# EAGLE board Placa de Cima (EAGLE 9.3.0)
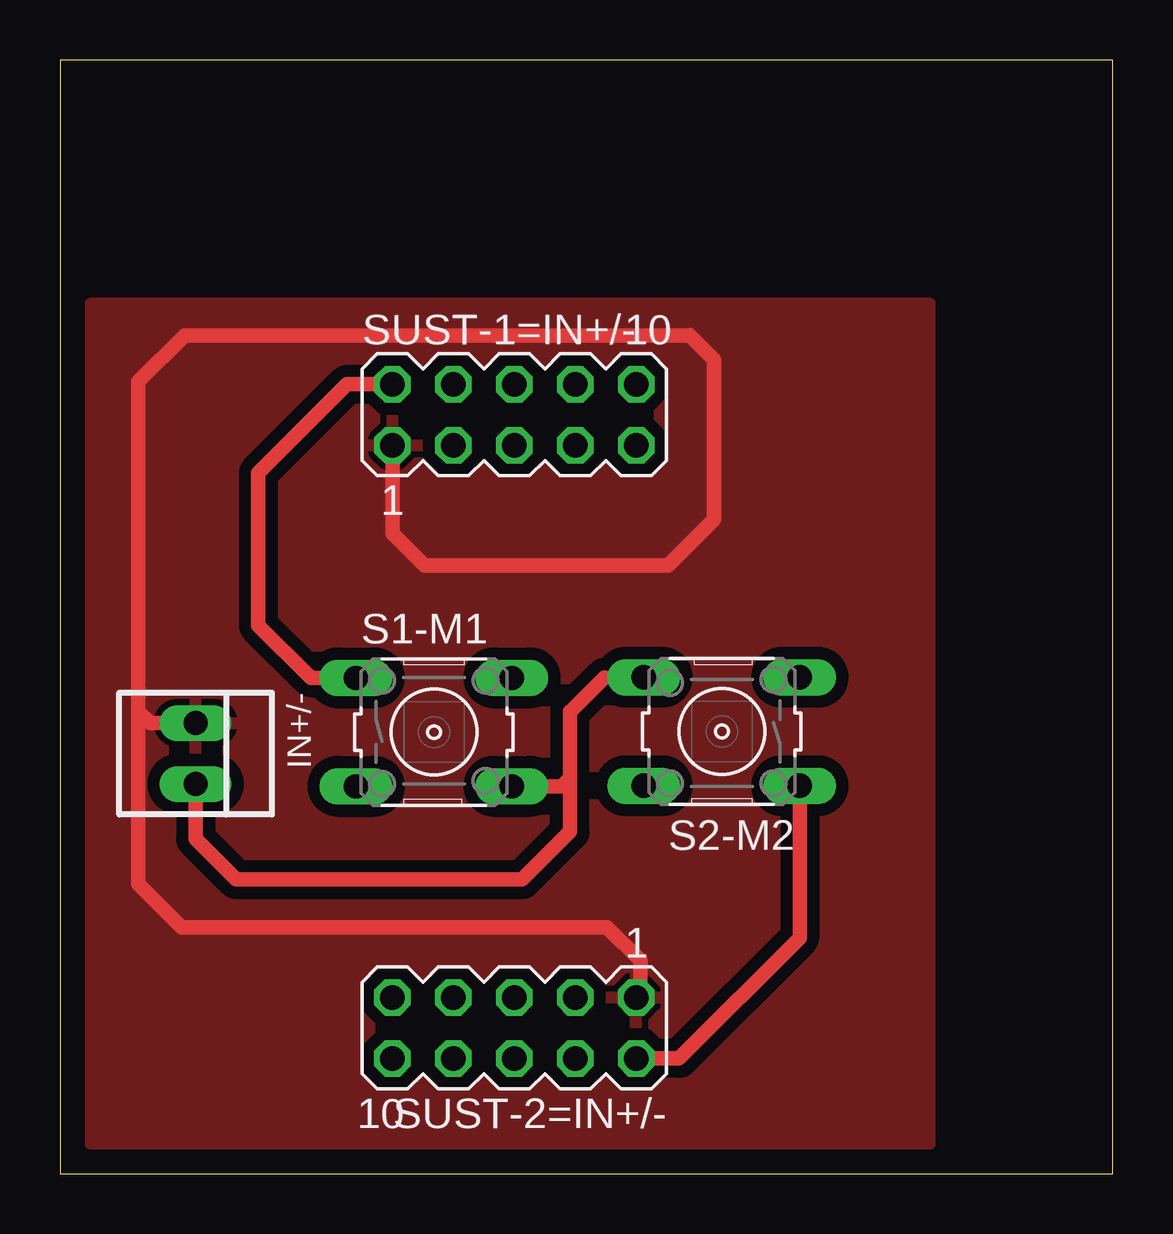
[diagram p0: board, top side]

Size 43.89 x 46.43 mm. Coordinates in mm from the lower left corner, seen from the top.
Outline: 0,0 43.89,0 43.89,46.43 0,46.43 0,0
Copper layers (1*16): Top 0.035mm / dielectric 1.5mm / Bottom 0.035mm
Design rules "default *": minimum track width 6mil, minimum drill 0.35mm, track to track 20mil, track to pad 20mil, pad to pad 8mil, via to via 8mil, smd to smd 8mil, copper to edge 40mil, drill to drill 6mil, minimum pad ring 10mil, minimum via ring 8mil, stop-mask expansion 4mil, vias tented up to drill 0mil, thermal gap 10mil

## Footprints (pad centres in the part's own frame; a part is rotated, then mirrored left to right if it is on the bottom)
22-23-2021 = drill 1 long: 1 -1.27,0; 2 1.27,0
B3F-10XX = drill 1.016 long: 1 -3.251,2.261; 2 3.251,2.261; 3 -3.251,-2.261; 4 3.251,-2.261
MA05-2 = drill 1.016 octagon: 1 -5.08,-1.27; 2 -5.08,1.27; 3 -2.54,-1.27; 4 -2.54,1.27; 5 0,-1.27; 6 0,1.27; 7 2.54,-1.27; 8 2.54,1.27; 9 5.08,-1.27; 10 5.08,1.27

## Placement (x,y rotation side)
IN+/-  22-23-2021  [22-23-2021]  5.65,17.52 270 top
S1-M1  [B3F-10XX]  15.59,18.41 0 top
S2-M2  [B3F-10XX]  27.59,18.44 180 top
SUST-1=IN+/-  [MA05-2]  18.94,31.64 0 top
SUST-2=IN+/-  [MA05-2]  18.94,6.08 180 top

## Library data of the parts
IN+/- = con-molex; MF: MOLEX; MPN: 22-23-2021; OC_FARNELL: 1462926; OC_NEWARK: 25C3832
S1-M1 S2-M2 = switch-omron; MPN: B3F-1000; OC_FARNELL: 176432; OC_NEWARK: 36M3542
SUST-1=IN+/- SUST-2=IN+/- = con-lstb; OC_FARNELL: unknown; OC_NEWARK: unknown

## Nets
GND: IN+/-.1 SUST-1=IN+/-.1 SUST-2=IN+/-.1
N$1: S1-M1.1 SUST-1=IN+/-.2
N$2: S2-M2.1 SUST-2=IN+/-.2
N$3: IN+/-.2 S1-M1.4 S2-M2.4

## Tracks (layer width: path | path; a pad name or v marks a point on that pad's centre or on a via)
GND
  Top 0.5: 26.27,35 27.27,34 27.27,27.27
  Top 0.61: SUST-2=IN+/-.1 24.19,7.52 24.19,8.89 22.81,10.27 5.08,10.27 3.27,12.08 3.27,19.27 | 3.27,19.27 3.75,18.79 IN+/-.1 | 3.27,19.27 3.27,33.02 5.2,34.95 26.27,34.95 27.27,33.95 27.27,27.27 25.35,25.35 15.19,25.35 13.86,26.68 SUST-1=IN+/-.1
  pour Top: 1.27,1.27 36.27,1.27 36.27,36.27 1.27,36.27
N$1
  Top 0.61: SUST-1=IN+/-.2 11.97,32.91 8.27,29.21 8.27,22.86 10.46,20.67 S1-M1.1
N$2
  Top 0.61: S2-M2.1 30.84,9.84 25.81,4.81 SUST-2=IN+/-.2
N$3
  Top 0.5: 21.27,14.27 21.27,16.27 | 21.27,16.27 21.27,16.51 | 21.27,19.27 21.32,19.32 | 24.13,20.7 22.7,20.7 | S1-M1.4 21.15,16.15 21.27,16.27
  Top 0.61: IN+/-.2 5.65,13.97 7.35,12.27 19.27,12.27 21.27,14.27 21.27,16.51 | 21.27,16.51 21.27,19.27 | 21.32,19.32 22.7,20.7 | S2-M2.4 24.13,20.7 | 21.27,16.51 20.91,16.15 S1-M1.4